# Altium PCB PCB1_1.pcbdoc
Units mil, origin at the board's own origin, x right, y up, seen from the top; angles counter-clockwise.
Board outline 3100 x 5680 mil, 2 copper layers (Top Layer, Bottom Layer); 60 components, 65 nets, 265 pads, 221 vias.
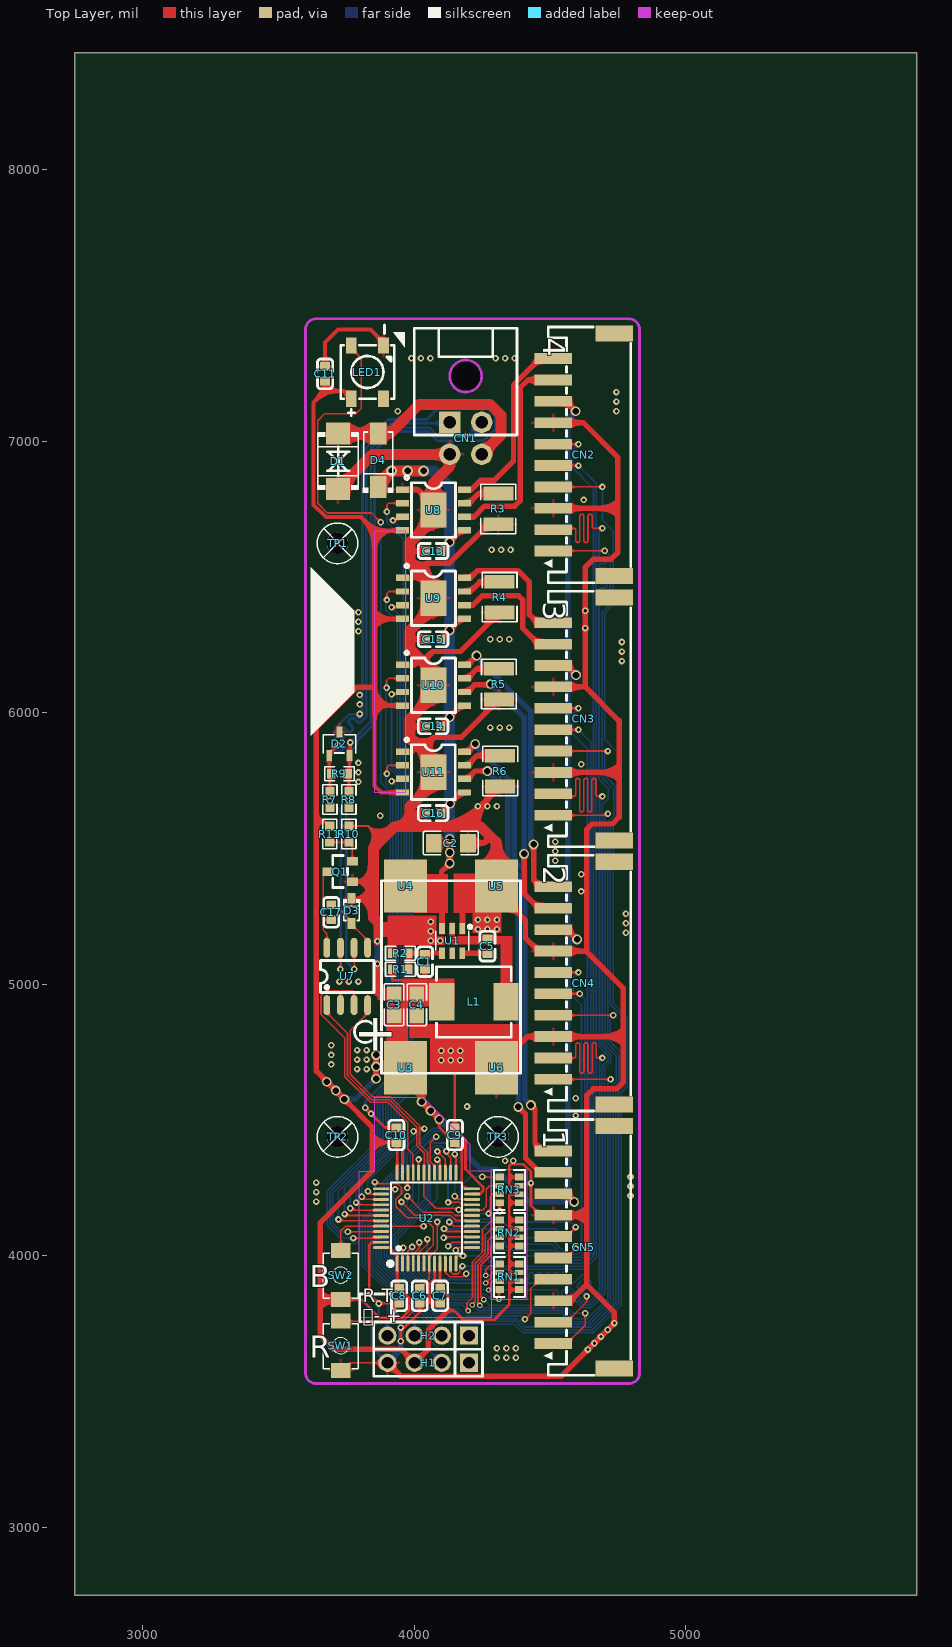
[diagram p0: Top Layer view]
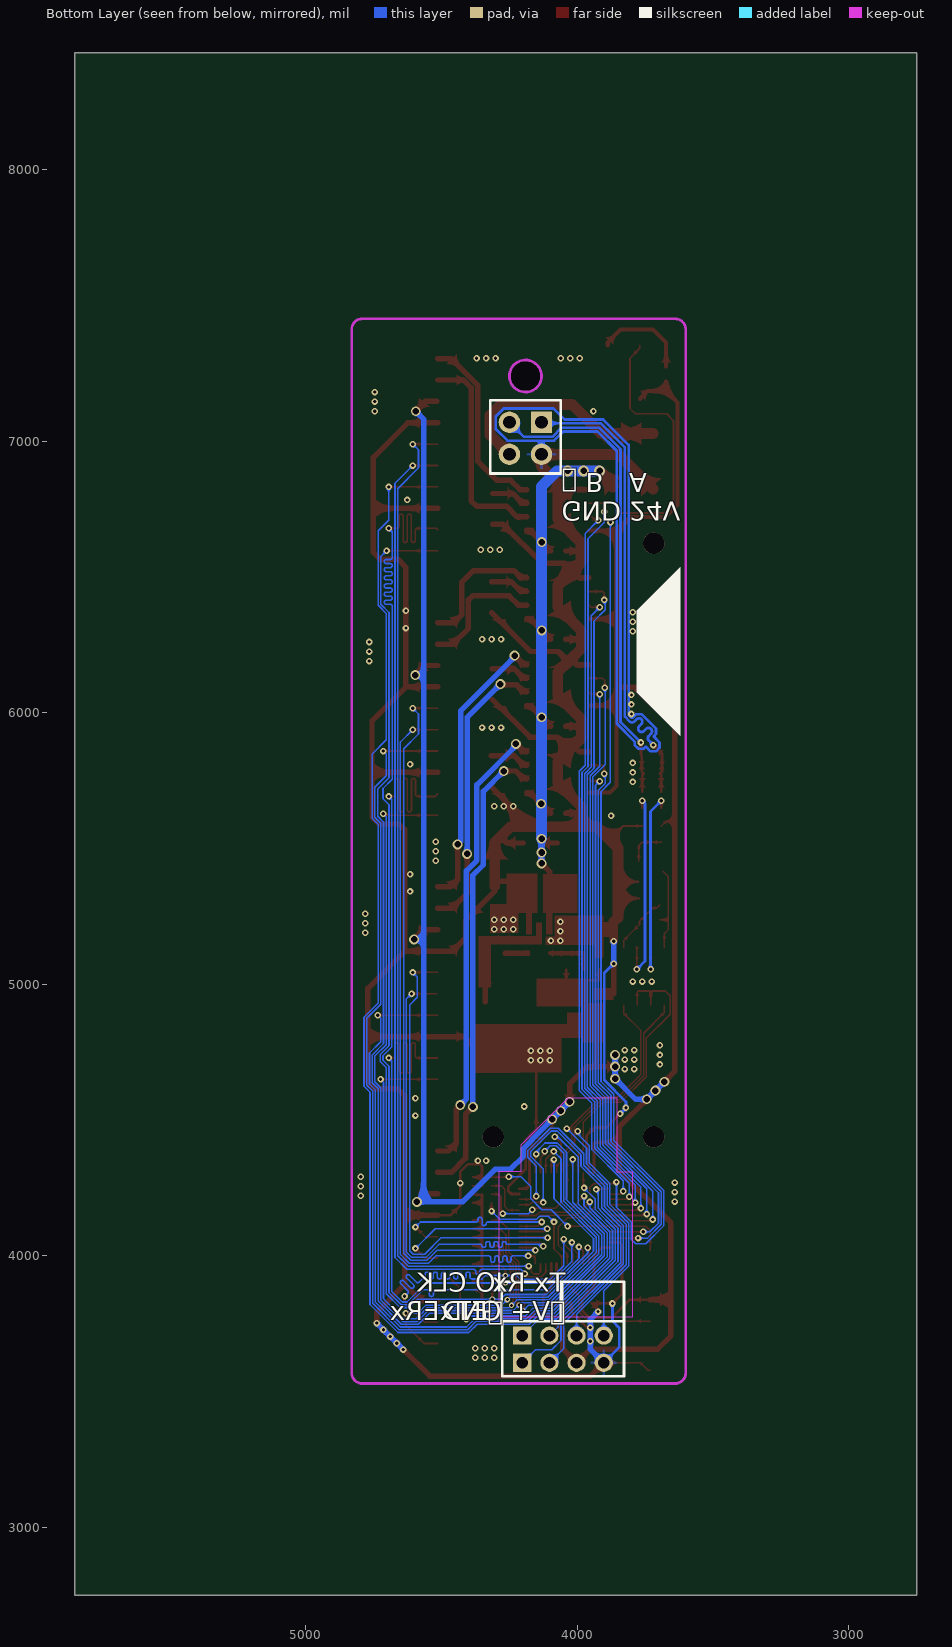
[diagram p1: Bottom Layer view, seen from below]

## Layer stack, top to bottom
Top Layer: signal copper (thickness not stored)
Dielectric: dielectric 12.6, FR-4, Dk 4.8
Bottom Layer: signal copper (thickness not stored)

## Board outline
5850,2750 2750,2750 2750,8430 5850,8430

## Design rules (kind name [scope] priority, off if disabled: settings)
BoardOutlineClearance copperThickness1oz [All] p0: genericclearance=10 ignorepadtopadclearanceinfootprint=FALSE except(0: Region-OutlineEdge Arc-SplitContinuation Track-SplitContinuation SMDPad-SplitContinuation THPad-SplitContinuation Via-SplitContinuation Fill-SplitContinuation Poly-SplitContinuation Region-SplitContinuation Text-SplitContinuation; 6: Track-OutlineEdge SMDPad-OutlineEdge THPad-OutlineEdge Via-OutlineEdge Fill-OutlineEdge Poly-OutlineEdge Text-OutlineEdge SMDPad-CutoutEdge THPad-CutoutEdge Via-CutoutEdge Fill-CutoutEdge Region-CutoutEdge; 11.8: Track-CutoutEdge)
BoardOutlineClearance copperThickness2oz [All] p0: genericclearance=10 ignorepadtopadclearanceinfootprint=FALSE except(0: Arc-SplitContinuation Track-SplitContinuation SMDPad-SplitContinuation THPad-SplitContinuation Via-SplitContinuation Fill-SplitContinuation Poly-SplitContinuation Region-SplitContinuation Text-SplitContinuation; 6: Track-OutlineEdge SMDPad-OutlineEdge THPad-OutlineEdge Via-OutlineEdge Fill-OutlineEdge Region-OutlineEdge Poly-OutlineEdge Text-OutlineEdge SMDPad-CutoutEdge THPad-CutoutEdge Via-CutoutEdge Fill-CutoutEdge Region-CutoutEdge; 11.8: Track-CutoutEdge)
Clearance copperThickness1oz [(InNet('$1N2752') OR InNet('$1N2756') OR InNet('$1N6554') OR InNet('24V') OR InNet('GND') OR InNet('3.3V') OR InNet('RS485_B') OR InNet('RS485_A') OR InNet('MCU_RX') OR InNet('MCU_TX') OR InNet('EXIT_TX') OR InNet('EXIT_RX') OR InNet('BOOT0') OR InNet('BOOT1') OR InNet('NRST') OR InNet('MCU_RTS') OR InNet('K_PULL1') OR InNet('K_ONLINE1') OR InNet('RGB_OUT1') OR InNet('MCU_SCL1') OR InNet('MCU_SDA1') OR InNet('MOTOR1_HOUT') OR InNet('MOTOR1_LOUT') OR InNet('K_PULL2') OR InNet('K_ONLINE2') OR InNet('RGB_OUT2') OR InNet('MCU_SCL2') OR InNet('MCU_SDA2') OR InNet('MOTOR2_HOUT') OR InNet('MOTOR2_LOUT') OR InNet('K_PULL3') OR InNet('K_ONLINE3') OR InNet('RGB_OUT3') OR InNet('MCU_SCL3') OR InNet('MCU_SDA3') OR InNet('MOTOR3_HOUT') OR InNet('MOTOR3_LOUT') OR InNet('K_PULL4') OR InNet('K_ONLINE4') OR InNet('RGB_OUT4') OR InNet('MCU_SCL4') OR InNet('MCU_SDA4') OR InNet('MOTOR4_HOUT') OR InNet('MOTOR4_LOUT') OR InNet('SWIO') OR InNet('SWCLK') OR InNet('SYS_RGB') OR InNet('$1N17664') OR InNet('$1N17864') OR InNet('$1N18070') OR InNet('$1N18276') OR InNet('MOTOR1_H') OR InNet('MOTOR1_L') OR InNet('MOTOR2_H') OR InNet('MOTOR2_L') OR InNet('MOTOR3_H') OR InNet('MOTOR3_L') OR InNet('MOTOR4_H') OR InNet('MOTOR4_L') OR InNet('$1N22936') OR InNet('$1N22933') OR InNet('$1N32717') OR InNet('$1N32182') OR InNet('$1N1340') OR InNet('$1N32139'))] p1: gap=7 ignorepadtopadclearanceinfootprint=FALSE except(0: Region-Sheet; 4: Track-Track; 6: Track-SMDPad SMDPad-SMDPad Track-THPad SMDPad-THPad THPad-THPad Track-Via SMDPad-Via THPad-Via Via-Via Track-Fill SMDPad-Fill THPad-Fill Via-Fill Fill-Fill SMDPad-Region THPad-Region Via-Region Fill-Region Region-Region Track-Poly SMDPad-Poly THPad-Poly Via-Poly Fill-Poly Poly-Poly Track-Text SMDPad-Text THPad-Text Via-Text Fill-Text Region-Text Poly-Text Text-Text Track-Sheet SMDPad-Sheet THPad-Sheet Via-Sheet Fill-Sheet Poly-Sheet Text-Sheet Track-Hole SMDPad-Hole THPad-Hole Via-Hole Fill-Hole Region-Hole Poly-Hole Text-Hole Sheet-Hole; 11.8: Track-Region Region-Poly)
Clearance copperThickness2oz [All] p1: gap=7 ignorepadtopadclearanceinfootprint=FALSE except(6: Track-SMDPad SMDPad-SMDPad Track-THPad SMDPad-THPad THPad-THPad Track-Via SMDPad-Via THPad-Via Via-Via Track-Fill SMDPad-Fill THPad-Fill Via-Fill Fill-Fill SMDPad-Region THPad-Region Via-Region Fill-Region Region-Region Track-Poly SMDPad-Poly THPad-Poly Via-Poly Fill-Poly Poly-Poly Track-Text SMDPad-Text THPad-Text Via-Text Fill-Text Region-Text Poly-Text Text-Text Track-Sheet SMDPad-Sheet THPad-Sheet Via-Sheet Fill-Sheet Region-Sheet Poly-Sheet Text-Sheet Track-Hole SMDPad-Hole THPad-Hole Via-Hole Fill-Hole Region-Hole Poly-Hole Text-Hole Sheet-Hole; 8: Track-Track; 11.8: Track-Region Region-Poly)
DiffPairsRouting differentialPair [All] p1: maxuncoupledlength=10 minlimit=5.9843 maxlimit=5.9843 mostfreqgap=5.9843 toplayer_minwidth=5 toplayer_prefwidth=10 toplayer_maxwidth=100 bottomlayer_minwidth=5 bottomlayer_prefwidth=10 bottomlayer_maxwidth=100
PasteMaskExpansion pasteMaskExpansion [All] p1: expansion=0
PlaneConnect innerPlane [All] p1: planeconnectstyle=Relief reliefexpansion=20 reliefentries=4 reliefconductorwidth=10 reliefairgap=10
PolygonConnect copperRegion [All] p1: connectstyle=Relief reliefentries=4 reliefconductorwidth=10 polygonreliefangle="90 Angle" airgapwidth=10
RoutingVias viaSize [All] p1: viastyle="Through Hole" holewidth=12.0078 minholewidth=11.811 maxholewidth=248.0314 width=24.0158 minwidth=19.685 maxwidth=393.7008
SolderMaskExpansion solderMaskExpansion [All] p1: useseparateexpansions=TRUE expansion=2.0079 expansionbottom=2.0079
Width copperThickness1oz [All] p1: maxlimit=100 minlimit=5 preferedwidth=10
Width copperThickness2oz [All] p1: maxlimit=100 minlimit=8 preferedwidth=10

## Components (designator, comment, footprint, x,y, rotation, side; value= is the part's Value field where it differs from the comment)
C1 "" C0603 4040,5083 r270 top
C2 "" C1206 4135,5520 r180 top
C3 "" C0805 3926.12,4925 r270 top
C4 "" C0805 4010,4925 r90 top
C5 "" C0603 4270,5140 r90 top
C6 "" C0603 4020.93,3853.15 r90 top
C7 "" C0603 4095.93,3853.15 r90 top
C8 "" C0603 3945.29,3853.15 r90 top
C9 "" C0603 4150,4445 r270 top
C10 "" C0603 3935,4445 r270 top
C11 "" C0603 3672.12,7247.03 r270 top
C13 "" C0603 4070,6595 r0 top
C14 "" C0603 4070.04,5950 r0 top
C15 "" C0603 4070.08,6270 r0 top
C16 "" C0603 4070.13,5630 r0 top
C17 "" C0603 3695,5265 r270 top
CN1 "" CONN-TH_4P-P3.00_HC-MX3.0-2X2AW_1 4190,7010 r180 top
CN2 "" CONN-SMD_10P-P2.00_2.0-10P-WT 4625.01,6949.09 r90 top
CN3 "" CONN-SMD_10P-P2.00_2.0-10P-WT 4625.01,5976.65 r90 top
CN4 "" CONN-SMD_10P-P2.00_2.0-10P-WT 4625.01,5004.21 r90 top
CN5 "" CONN-SMD_10P-P2.00_2.0-10P-WT 4625.01,4031.77 r90 top
D1 "" SMB_L4.6-W3.6-LS5.3-BI 3720,6925 r90 top
D2 "" SOT-23-3_L3.0-W1.7-P0.95-LS2.9-BR 3725,5885 r270 top
D3 "" SOD-323_L1.8-W1.3-LS2.5-RD 3770,5270 r270 top
D4 "" SMA_L4.4-W2.8-LS5.4-R-RD 3867.43,6929.08 r90 top
H1 "" HDR-TH_4P-P2.54-V-M 4051.82,3606.39 r180 top
H2 "" HDR-TH_4P-P2.54-V-M 4051.82,3706.39 r180 top
L1 "" IND-SMD_L7.3-W6.8 4220,4935 r180 top
LED1 "" LED-SMD_4P-L5.0-W5.0-BL_XL-5050RGBC 3828.08,7253.97 r0 top
Q1 "" SOT-23_L2.9-W1.3-P1.90-LS2.4-BR 3727.57,5415 r0 top
R1 "" R0603 3949,5055 r180 top
R2 "" R0603 3949,5114 r0 top
R3 "" R1210 4310,6750 r270 top
R4 "" R1210 4314.68,6425 r270 top
R5 "" R1210 4312.34,6105 r270 top
R6 "" R1210 4317.02,5785 r270 top
R7 "" R0603 3690,5680 r90 top
R8 "" R0603 3760,5680 r90 top
R9 "" R0603 3725,5775 r180 top
R10 "" R0603 3760,5552.8 r270 top
R11 "" R0603 3689.1,5552.8 r270 top
RN1 "" RES-ARRAY-SMD_0603-8P-L3.2-W1.6-BL 4350.93,3922.86 r270 top
RN2 "" RES-ARRAY-SMD_0603-8P-L3.2-W1.6-BL 4350.93,4084.3 r270 top
RN3 "" RES-ARRAY-SMD_0603-8P-L3.2-W1.6-BL 4350.93,4242.86 r270 top
SW1 "" KEY-SMD_B3U-1000PM 3730,3670 r270 top
SW2 "" KEY-SMD_B3U-1000PM 3730,3930 r270 top
TP1 "" M2螺丝 3718.11,6623.23 r0 top
TP2 "" M2螺丝 3718.11,4438.19 r0 top
TP3 "" M2螺丝 4308.66,4438.19 r0 top
U1 "={Manufacturer Part}" SOT-23-6_L2.9-W1.6-P0.95-LS2.8-BL 4140,5160 r180 top
U2 "" LQFP-48_L7.0-W7.0-P0.50-LS9.0-BL 4045.96,4138.97 r0 top
U3 "" "SMD 方焊盘 4*5" 3968.59,4692.41 r180 top
U4 "" "SMD 方焊盘 4*5" 3968.59,5361.7 r180 top
U5 "" "SMD 方焊盘 4*5" 4303.23,5361.7 r0 top
U6 "" "SMD 方焊盘 4*5" 4303.23,4692.41 r0 top
U7 "" SOP-8_L4.9-W3.9-P1.27-LS6.0-BL 3753.8,5028.77 r0 top
U8 "" ESOP-8_L4.9-W3.9-P1.27-LS6.0-BL-EP 4071.35,6745.92 r270 top
U9 "" ESOP-8_L4.9-W3.9-P1.27-LS6.0-BL-EP 4071.27,6420.92 r270 top
U10 "" ESOP-8_L4.9-W3.9-P1.27-LS6.0-BL-EP 4071.31,6100.92 r270 top
U11 "" ESOP-8_L4.9-W3.9-P1.27-LS6.0-BL-EP 4071.23,5780.92 r270 top

## Footprints (in the part's own frame and the unit in brackets; to place one, negate y for a bottom-side part, rotate by r counter-clockwise, add the part's x,y. Pads: shape width x height; smd on the part's side, far side on the other; paste and mask are expansions set on the pad)
C0603 [mm]
  rect 0.8x0.9 smd: 1(-0.7,0) 2(0.7,0)
  silkscreen extent -1.39,-0.71 1.39,0.71
C0805 [mm]
  rect 1.41x1.35 smd: 1(-1,0) 2(1,0)
  silkscreen extent -1.96,-0.9 1.96,0.9
C1206 [mm]
  rect 1.485x1.728 smd: 1(-1.593,0) 2(1.593,0)
  silkscreen extent -2.56,-1.09 2.56,1.09
CONN-SMD_10P-P2.00_2.0-10P-WT [mm]
  rect 1x3.5 smd: 1(-9,2.85) 2(-7,2.85) 3(-5,2.85) 4(-3,2.85) 5(-1,2.85) 6(1,2.85) 7(3,2.85) 8(5,2.85) 9(7,2.85) 10(9,2.85)
  rect 1.5x3.5 smd: 11(11.35,-2.85) 12(-11.35,-2.85)
  silkscreen extent -11.96,-4.37 11.95,3.74
CONN-TH_4P-P3.00_HC-MX3.0-2X2AW_1 [mm]
  rect 2x2 hole 1.2: 1(1.5,-1.5)
  round 2 hole 1.2: 2(1.5,1.5) 3(-1.5,-1.5) 4(-1.5,1.5)
  Board Outline Layer circle w0.005: c0,-5.82 r1.5
  Board Outline Layer circle w0.254: c0,-5.82 r1.5
  Multi-Layer board cut-out: -1.5,-5.82 -1.351,-6.471 -0.935,-6.993 -0.334,-7.282 0.334,-7.282 0.935,-6.993 1.352,-6.471 1.5,-5.82 1.5,-5.82 1.299,-5.07 0.75,-4.521 0,-4.32 -0.75,-4.521 -1.299,-5.07 -1.5,-5.82
  silkscreen extent -4.8,-10.3 4.8,-0.3
ESOP-8_L4.9-W3.9-P1.27-LS6.0-BL-EP [mm]
  rect 0.6x1.2 smd: 1(-1.905,-2.908) 2(-0.635,-2.908) 3(0.635,-2.908) 4(1.905,-2.908) 5(1.905,2.908) 6(0.635,2.908) 7(-0.635,2.908) 8(-1.905,2.908)
  rect 3.3x2.4 smd: 9(0,0)
  silkscreen extent -3.2,-2.67 2.55,2.05
HDR-TH_4P-P2.54-V-M [mm]
  rect 1.7x1.7 hole 1.1: 1(-3.81,0)
  round 1.7 hole 1.1: 2(-1.27,0) 3(1.27,0) 4(3.81,0)
  silkscreen extent -5.08,-1.27 5.08,1.27
IND-SMD_L7.3-W6.8 [mm]
  rect 2.35x3.5 smd: 1(-3,0) 2(3,0)
  silkscreen extent -3.5,-3.3 3.5,3.3
KEY-SMD_B3U-1000PM [mm]
  rect 1.4x1.8 smd: 1(-2.286,0) 2(2.314,0)
  silkscreen extent -2.04,-1.65 2.16,1.65
LED-SMD_4P-L5.0-W5.0-BL_XL-5050RGBC [mm]
  rect 1x1.5 smd: 1(-1.5,-2.5) 2(1.5,-2.5) 3(1.5,2.5) 4(-1.5,2.5)
  silkscreen extent -2.5,-4.1 2.5,4.4
LQFP-48_L7.0-W7.0-P0.50-LS9.0-BL [mm]
  oval 0.27x1.5 smd: 1(-2.75,-4.25) 2(-2.25,-4.25) 3(-1.75,-4.25) 4(-1.25,-4.25) 5(-0.75,-4.25) 6(-0.25,-4.25) 7(0.25,-4.25) 8(0.75,-4.25) 9(1.25,-4.25) 10(1.75,-4.25) 11(2.25,-4.25) 12(2.75,-4.25) 25(2.75,4.25) 26(2.25,4.25) 27(1.75,4.25) 28(1.25,4.25) 29(0.75,4.25) 30(0.25,4.25) 31(-0.25,4.25) 32(-0.75,4.25) 33(-1.25,4.25) 34(-1.75,4.25) 35(-2.25,4.25) 36(-2.75,4.25)
  oval 1.5x0.27 smd: 13(4.25,-2.75) 14(4.25,-2.25) 15(4.25,-1.75) 16(4.25,-1.25) 17(4.25,-0.75) 18(4.25,-0.25) 19(4.25,0.25) 20(4.25,0.75) 21(4.25,1.25) 22(4.25,1.75) 23(4.25,2.25) 24(4.25,2.75) 37(-4.25,2.75) 38(-4.25,2.25) 39(-4.25,1.75) 40(-4.25,1.25) 41(-4.25,0.75) 42(-4.25,0.25) 43(-4.25,-0.25) 44(-4.25,-0.75) 45(-4.25,-1.25) 46(-4.25,-1.75) 47(-4.25,-2.25) 48(-4.25,-2.75)
  silkscreen extent -3.59,-4.46 3.3,3.34
M2螺丝 [mm]
  round 2 hole 2: 1(0,0)
  silkscreen extent -1.9,-1.9 1.9,1.9
R0603 [mil]
  rect 31.75x34.02 smd: 1(-29.66,0) 2(29.66,0)
  silkscreen extent -55,-26 55,26
R1210 [mil]
  rect 50.49x110.55 smd: 1(-56.74,0) 2(56.74,0)
  silkscreen extent -91,-64 91,64
RES-ARRAY-SMD_0603-8P-L3.2-W1.6-BL [mm]
  rect 0.65x0.8 smd: 1(-1.2,-0.9) 4(1.2,-0.9) 5(1.2,0.9) 8(-1.2,0.9)
  rect 0.5x0.8 smd: 2(-0.4,-0.9) 3(0.4,-0.9) 6(0.4,0.9) 7(-0.4,0.9)
  silkscreen extent -1.87,-1.45 1.87,1.47
SMA_L4.4-W2.8-LS5.4-R-RD [mil]
  rect 81.2x60.59 smd: 1(98.57,0) 2(-98.57,0)
  silkscreen extent -119,-56 104,56
SMB_L4.6-W3.6-LS5.3-BI [mil]
  rect 80.61x88.23 smd: 1(-102.02,0) 2(102.02,0)
  silkscreen extent -105,-75 108,75
"SMD 方焊盘 4*5" [mm]
  rect 4x5 smd: 1(0,0)
SOD-323_L1.8-W1.3-LS2.5-RD [mm]
  rect 1x0.75 smd: 1(-1.173,0) 2(1.173,0)
  silkscreen extent -1.08,-0.8 0.9,0.8
SOP-8_L4.9-W3.9-P1.27-LS6.0-BL [mm]
  oval 0.63x1.865 smd: 1(-1.905,-2.682) 2(-0.635,-2.682) 3(0.635,-2.682) 4(1.905,-2.682) 5(1.905,2.682) 6(0.635,2.682) 7(-0.635,2.682) 8(-1.905,2.682)
  silkscreen extent -2.5,-1.5 2.5,1.48
SOT-23-3_L3.0-W1.7-P0.95-LS2.9-BR [mil]
  rect 40.85x20.95 smd: 1(43.36,-37.4) 2(43.36,37.4) 3(-43.36,0)
  silkscreen extent -34,-60 34,60
SOT-23-6_L2.9-W1.6-P0.95-LS2.8-BL [mil]
  rect 20.95x42.2 smd: 1(-37.4,-45.24) 2(0,-45.24) 3(37.4,-45.24) 4(37.4,45.24) 5(0,45.24) 6(-37.4,45.24)
  silkscreen extent -72,-57 61,35
SOT-23_L2.9-W1.3-P1.90-LS2.4-BR [mm]
  rect 1x0.8 smd: 1(1.15,-0.95) 2(1.15,0.95) 3(-1.15,0)
  silkscreen extent -0.7,-1.5 0.7,1.5

## Via types
v1: diameter 24.02, hole 12.01, Top Layer to Bottom Layer, 182 vias
v2: diameter 36, hole 24, Top Layer to Bottom Layer, 28 vias
v3: diameter 19.68, hole 11.81, Top Layer to Bottom Layer, 8 vias
v4: diameter 40, hole 24, Top Layer to Bottom Layer, 3 vias

## Nets (pads, with @x,y where several pads share a name; then routed paths per layer and width w, separated by ;. In a path a pad name is that pad's centre, name@x,y a point inside that pad or via, vN(x,y) a via of type N, cw(c..) or ccw(c..) an arc to the next point about the centre after c; other vN are vias at no path point)
3.3V: C1.2 C3.2 C4.2 C7.2 C8.2 C9.2 C10.2 C11.2 CN2.8 CN3.8 CN4.8 CN5.8 H1.3 L1.2 LED1.1 R1.2 R11.1 RN1.5 RN1.6 RN1.7 RN1.8 RN2.5 RN2.6 RN2.7 RN2.8 RN3.5 RN3.6 SW2.2 U2.1 U2.9 U2.24 U2.36 U2.48 U3.1 U8.4 U9.4 U10.4 U11.4 | length 13554.9
  Top Layer w6: 3640,5600 3671.57,5600 R11.1 ; 3655,3838.72 3655.18,3838.9 ; 4350,3875 4385.74,3875 RN1.5 ; 4350,3907.21 4350.09,3907.11 RN1.6 ; 4350,3935.99 4383.74,3935.99 RN1.7 ; 4350,3970.23 4350.13,3970.1 RN1.8 ; 4350,4037.89 4350.83,4037.06 RN2.5 ; 4350,4067.79 4350.76,4068.55 RN2.6 ; 4350,4098.68 4351.38,4100.05 RN2.7 ; 4350,4131.01 4385.84,4131.01 RN2.8 ; 4350,4195.45 4350.18,4195.62 RN3.5 ; 4350,4225 4384.25,4225 RN3.6
  Top Layer w10: SW2.2 3806.1,3838.9 3872.98,3772.02 3955.02,3772.02 3982.21,3799.21 3982.21,3843.78 C8.2 3937.69,3888.31 U2.1 3937.69,4002.31 3909.3,4030.7 U2.48 ; 3845,4417.01 3845.43,4417.44 C10.2 3937.69,4414.75 U2.36 ; R1.2@3920.34,5055 3920.34,5015 4009.93,5015 4040,5015 C1.2@4040,5052.44 ; C4.2 4010,5014.93 ; v2(4092.3,4502.7) 4092.3,4475.14 C9.2 4175,4392.44 4175,4260 4187.76,4247.24 U2.24 ; U2.9 4095.17,3881.47 C7.2 4124.63,3852.01 4124.63,3798.22 4146.78,3798.22 4180,3765 4295,3765 4350,3820 4350,3875 4350,3907.21 4350,3935.99 4350,3970.23 4350,4037.89 4350,4067.79 4350,4098.68 4350,4131.01 4350,4195.45 4350,4225
  Top Layer w15: C11.2 3672.12,7184.47 3671.52,7183.86 ; LED1.1 3740.71,7183.86 3671.52,7183.86 ; 3854.39,6344.78 3955.63,6344.78 U9.4 ; U11.4 3879.08,5705.92 3854.39,5730.61 3854.39,6025.84 3854.47,6025.92 U10.4 ; U8.4 3955.93,6670 3854.39,6670 3804.39,6720 3675,6720 3630,6765 3630,7142.35 3671.52,7183.86
  Top Layer w20: 3655.18,3838.9 SW2.2 ; 3854.39,6025.84 3854.39,6092.99 ; 3854.39,6670 3854.39,6344.78 3854.39,6092.99 ; v2(3860,4652.31) v2(3860,4696.9) ; v2(3860,4740) v2(3860,4696.9) ; v2(4092.3,4502.7) v2(4060.52,4534.48) v2(4027.5,4567.5) 4027.5,4633.5 U3.1 ; L1.2 4101.89,4964.37 C4.2 4006.62,4964.37 3927.88,4885.63 3927.88,4712.12 U3.1@3943.1,4696.9 ; 4128.17,3801.75 4124.63,3798.22 4082.25,3755.84 4081.33,3755.84 4052.37,3726.87 4052.37,3656.94 H1.3 3951.27,3656.94 3703.06,3656.94 3655,3705 3655,3838.72 3655,4122.16 3845,4312.16 3845,4417.01 3845,4475 v2(3743.35,4576.65) v2(3711.57,4608.43) v2(3678.54,4641.46) 3640,4680 3640,5600 3640,5944.59 3788.41,6092.99 3854.39,6092.99 ; CN5.8 4559.35,4228.62 v2(4589.42,4198.55) ; CN4.8 4563.94,5201.06 v2(4600,5165) ; CN3.8 4560.94,6173.5 v2(4596.02,6138.43) ; CN2.8@4517.13,7145.94 4558.27,7145.94 v2(4594.34,7109.88) ; v2(3860,4696.9) U3.1@3943.1,4696.9 ; U3.1@3943.1,4696.9 3947.59,4692.41 U3.1 ; U3.1@3943.1,4696.9 3964.1,4696.9 U3.1
  Bottom Layer w20: v2(3678.54,4641.46) v2(3711.57,4608.43) v2(3743.35,4576.65) 3784.35,4576.65 v2(3860,4652.31) v2(3860,4696.9) v2(3860,4740) ; v2(4027.5,4567.5) v2(4060.52,4534.48) v2(4092.3,4502.7) 4165,4430 4165,4428.23 4198.02,4395.2 4198.02,4366.23 4245,4319.25 4300.75,4319.25 4421.45,4198.55 4565,4198.55 ; v2(4589.42,4198.55) 4565,4198.55 ; v2(4594.34,7109.88) 4565,7080.54 4565,6137.97 ; v2(4596.02,6138.43) 4595.55,6137.97 4565,6137.97 ; v2(4600,5165) 4567.33,5165 4565,5167.33 ; 4565,4198.55 4565,5167.33 ; 4565,5167.33 4565,6137.97
24V: C2.2 C13.2 C14.2 C15.2 C16.2 D4.2 U1.3 U4.1 U8.5 U9.5 U10.5 U11.5 | length 2534.4
  Top Layer w20: C2.2 v2@4130.94,5520 ; 4095.63,5380 4100.82,5380 4100.82,5414.88 v2(4130.94,5445) v2(4130.94,5485.07) v2@4130.94,5520 ; C13.2 v2(4130.5,6627.94) 4173.48,6670.92 U8.5 ; C14.2 4173.52,6025.92 U10.5 ; C15.2 v2(4130.29,6302.64) 4173.56,6345.92 U9.5 ; C16.2 v2(4132.64,5664.96) 4173.6,5705.92 U11.5 ; v2(4130.94,5536.02) v2@4130.94,5520
  Top Layer w40: D4.2 3867.43,6840.51 v4(3916.92,6890) v4(3976.2,6890) v4(4035,6890)
  Bottom Layer w20: v2(4130.94,5445) v2(4130.94,5485.07) v2(4130.94,5536.02)
  Bottom Layer w40: v4(3916.92,6890) v4(3976.2,6890) v4(4035,6890) 4073.78,6890 4130.94,6832.84 v2(4130.94,5982.72) v2(4130.94,5536.02)
$1N1340: C17.1 D3.2 U7.5 | length 222.2
  Top Layer w6: C17.1 3707.56,5280 3722.32,5280 3770,5232.32 D3.2 3770,5220.22 3828.8,5161.42 U7.5
$1N2752: C5.2 L1.1 U1.2 | length 448.7
  Top Layer w20: U1.2@4140,5200.24 4140,5171.96 4154.14,5157.81 4327.19,5157.81 4338.11,5146.89 L1.1
$1N2756: C5.1 U1.6 | length 93.6
  Top Layer w10: U1.6 4267.68,5114.76 C5.1
$1N6554: C1.1 R1.1 R2.2 U1.4 | length 183.3
  Top Layer w10: R1.1 R2.2 4101.84,5114 U1.4
$1N17664: R3.1 U8.7 | length 139
  Top Layer w20: U8.7 4200.92,6770.92 4236.74,6806.74 R3.1
$1N17864: R4.1 U9.7 | length 143.7
  Top Layer w20: U9.7 4205.92,6445.92 4241.74,6481.74 R4.1
$1N18070: R5.1 U10.7 | length 141.4
  Top Layer w20: U10.7 4195.92,6125.92 4231.74,6161.74 R5.1
$1N18276: R6.1 U11.7 | length 146.1
  Top Layer w20: U11.7 4195.92,5805.92 4231.74,5841.74 R6.1
$1N22933: CN1.1 D2.1 R7.2 R9.2 | length 1775.8
  Top Layer w10: R7.2 3690,5769.66 R9.2 3687.6,5782.74 D2.1 3687.6,5848.58 v1(3719.51,5880.49)
  Bottom Layer w10: v1(3719.51,5880.49) 3735.94,5896.93 ccw(c3727.1,5905.77) 3735.94,5914.6 3728.04,5922.51 cw(c3736.88,5931.35) 3745.72,5940.18 3753.62,5932.28 ccw(c3762.46,5941.12) 3771.3,5949.96 3763.4,5957.86 cw(c3772.24,5966.7) 3781.07,5975.54 3788.98,5967.64 ccw(c3797.81,5976.48) 3806.65,5967.64 3824.02,5985 3824.02,6976.44 3912.57,7065 4126.89,7065 CN1.1
$1N22936: CN1.3 D2.2 R8.2 R9.1 | length 1775.8
  Top Layer w10: R8.2 3760,5769.66 R9.1 3762.4,5782.74 D2.2 3765,5844.24 v1(3765,5890)
  Bottom Layer w10: v1(3765,5890) 3840,5965 3840,6969.82 3919.19,7049.02 4056.71,7049.02 4090.41,7015.31 4195.31,7015.31 CN1.3
$1N32139: Q1.2 R10.2 R11.2 | length 147
  Top Layer w6: R11.2 R10.2 3772.85,5510.3 Q1.2
$1N32182: C17.2 Q1.3 U7.8 | length 323.8
  Top Layer w6: U7.8 3678.8,5186.2 3665,5200 3665,5236.71 3665.73,5237.44 ; Q1.3 3665,5397.71 3665,5237.44 3665.73,5237.44 ; C17.2 3665.73,5237.44
$1N32717: CN1.4 D1.2 D4.1 | length 834.7
  Top Layer w40: D1.2 3866.8,7027.02 D4.1 3911.38,7027.65 4018.73,7135 4280,7135 4320,7095 4320,7021.89 CN1.4
BOOT0: RN3.1 SW2.1 U2.44 | length 766.4
  Top Layer w6: SW2.1 3730,4092.14 3747.3,4109.44 U2.44 v1(4035,4109.44) ; v1(4251.26,4291.26) 4252.41,4290.1 RN3.1
  Bottom Layer w6: v1(4035,4109.44) 4095.56,4170 4129.69,4170 4170.99,4211.3 4170.99,4255.43 4206.82,4291.26 v1(4251.26,4291.26)
BOOT1: RN3.2 U2.20 | length 177
  Top Layer w6: U2.20 4252.5,4168.5 4265.81,4181.81 4265.81,4245.81 4278.61,4258.61 RN3.2
EXIT_RX: H1.2 U2.22 | length 1470.9
  Top Layer w6: v1(4150,4220) 4162.13,4207.87 U2.22
  Bottom Layer w6: H1.2 4049.35,3658.85 4049.35,3751.24 3829.53,3971.06 3829.53,4111.57 3899.15,4181.19 3899.15,4257.69 3975.41,4333.95 3975.41,4376.49 4068.92,4470 4099.16,4470 4181.01,4388.16 4181.01,4362.16 4180.02,4361.16 4180.02,4360.85 4150,4330.84 v1(4150,4220)
EXIT_TX: H1.1 U2.21 | length 1563.1
  Top Layer w6: v1(4125,4196.8) 4167.29,4196.8 4175.9,4188.18 U2.21
  Bottom Layer w6: v1(4125,4196.8) 4125,4320 4170,4365 4170,4365.31 4170.99,4366.3 4170.99,4383.7 4170,4384.69 4170,4385 4095.02,4459.98 4073.07,4459.98 3985.42,4372.34 3985.42,4329.8 3909.16,4253.54 3909.16,4177.04 3839.54,4107.42 3839.54,3975.21 4059.37,3755.39 4059.37,3688.8 4093.17,3655 4153.2,3655 H1.1
GND: C2.1 C3.1 C4.1 C6.1 C7.1 C8.1 C9.1 C10.1 C11.1 C13.1 C14.1 C15.1 C16.1 CN1.2 CN2.3 CN2.7 CN3.3 CN3.7 CN4.3 CN4.7 CN5.3 CN5.7 D1.1 D2.3 D3.1 H1.4 LED1.3 Q1.1 R2.1 R3.2 R4.2 R5.2 R6.2 R10.1 RN3.7 RN3.8 SW1.2 U1.1 U2.8 U2.23 U2.35 U2.47 U5.1 U6.1 U8.1 U8.9 U9.1 U9.9 U10.1 U10.9 U11.1 U11.9 | length 20382.8
  Top Layer w6: SW1.2 3738.9,3578.9 3766.39,3606.39 H1.4 ; R10.1 3830.03,5582.46 3880.35,5532.15 ; D3.1 3849.04,5316.16 3850,5317.13 ; Q1.1 3849.35,5377.6 3850,5376.95 ; 4350,4258.61 RN3.7 ; 4350,4290.1 RN3.8
  Top Layer w10: v1(3820,4545) v1(3841.69,4523.31) 3892.44,4472.56 C10.1 3965,4442.56 3965,4395 3957.38,4387.38 U2.35 ; U2.47 3845.39,4050.39 3835,4040 3835,3860 3869.41,3825.59 C8.1 3922.81,3803.11 v1(3922.81,3795.01) ; v1(3951.27,3685.53) v1(3951.27,3736.28) 3963.8,3736.28 4020.93,3793.41 C6.1 4055,3825.59 ; U2.8 4075.49,3915.49 4055,3895 4055,3825.59 ; C7.1 4055,3825.59 ; 4190.84,4330 4189.02,4328.17 ; U2.23 4242.55,4227.55 4253.79,4238.79 4253.79,4254.31 4189.02,4319.09 4189.02,4328.17 ; U6.1 4150,4692.41 C9.1 4150,4466.44 4189.02,4427.42 4189.02,4328.17 ; 4350,4258.61 4350,4290.1 4350,4330 4357.07,4337.07 4402.93,4337.07 4430,4310 v1(4430,4268.18) 4430,4185 4465.12,4149.88 CN5.7
  Top Layer w15: C11.1 3672.12,7362.12 3720,7410 3840,7410 3887.13,7362.87 LED1.3
  Top Layer w20: v1(3865,5075.76) 3865,4964.37 C3.1@3927.88,4964.37 ; H1.4 3951.27,3556.94 4541.94,3556.94 v1(4640,3655) v1(4663.72,3678.72) v1(4687.94,3702.94) v1(4712.74,3727.74) v1(4737.54,3752.54) 4737.54,3792.46 4635,3895 ; U11.1 3990.92,5855.92 4005,5870 ; U9.1 3992.93,6495.92 4018.5,6521.5 4047.01,6550 4130,6550 4273.26,6693.26 R3.2 ; U10.1 4000.71,6175.92 4022.39,6197.61 ; U8.1 4014.08,6820.92 U8.9@4071.35,6763.65 ; 3984.76,5628.44 3986.32,5630 C16.1 ; 3984.84,5949.32 3985.52,5950 C14.1 ; 3984.97,6270 C15.1 ; 3985,6591.6 3988.4,6595 C13.1 ; C4.1 4010,4820 4135,4820 v1(4135,4755) ; 4026.88,5863.12 4073.76,5910 4174.08,5910 R5.2 ; 4031.93,6188.07 4068.85,6225 4171.42,6225 R4.2 ; 4168.76,5580 R6.2 ; 4174.37,5380 4284.94,5380 U5.1 4303.23,5341.77 4410,5235 4410,5170 4457.68,5122.32 CN4.7 4632.68,5122.32 4635,5120 ; C2.1 4259.08,5520 4282.04,5542.96 ; U6.1 4418.18,4807.36 CN4.3 4769.19,4807.36 4770,4808.17 ; CN5.3 4574.92,3834.92 4635,3895 ; CN5.7 4633.66,4149.88 4635,4151.23 ; CN3.3 4752.07,5779.8 4755,5776.87 ; CN3.7 4630,6094.76 ; CN2.3 4748.34,6752.24 4750,6750.59 ; CN2.7 4622.8,7067.2 4750,6940 4750,6750.59 ; 4630,6094.76 4630.24,6094.76 4755,5970 4755,5776.87 ; 4630,6094.76 v1(4630,6311.26) v1(4630,6374.69) 4630,6535 4660,6565 4725,6565 4750,6590 4750,6750.59 ; 4635,3895 4635,4151.23 ; 4635,4151.23 4635,4590 4660,4615 4745,4615 4770,4640 4770,4808.17 ; 4635,5120 4770,4985 4770,4808.17 ; 4635,5120 4635,5570 4655,5590 4730,5590 4755,5615 4755,5776.87
  Top Layer w30: v1(3865,5157.93) 3865,5230
  Top Layer w40: D1.1 3847.02,6950 4130,6950 CN1.2 4130.94,6905.94 4071.35,6846.35 4071.35,6763.65 U8.9 4071.35,6713.24 3985,6626.89 3985,6591.6 3985,6555 4018.5,6521.5 4071.27,6468.73 U9.9 4071.27,6388.24 3984.92,6301.89 3984.92,6269.95 3984.92,6235.08 4022.39,6197.61 4031.93,6188.07 4071.19,6148.81 4071.19,6063.24 3984.84,5976.89 3984.84,5949.32 3984.84,5905.16 4026.88,5863.12 4071.11,5818.89 4071.11,5741.11 3984.76,5654.76 3984.76,5628.44 3984.76,5580 ; 3865,5230 3850,5245 3850,5317.13 3850,5376.95 3850,5501.81 3880.35,5532.15 3928.19,5580 3984.76,5580 ; U5.1 4303.23,5521.77 4282.04,5542.96 4245,5580 4168.76,5580 3984.76,5580
  Bottom Layer w10: 3790.98,5985.45 3795.41,5981.03 3800.22,5981.03 3810,5990.81 3810,6985 3904.02,7079.02 4046.63,7079.02 4087.03,7119.41 4269.91,7119.41 4299.41,7089.91 4299.41,7044.41 4256.3,7001.3 4131.29,7001.3 ; 3790.98,5985.54 3782.31,5994.22 3762.16,5994.22 3709.36,5941.42 3709.36,5921.36 3717.86,5912.86 3717.86,5911.36 3696.52,5890.02 3696.52,5870.97 3709.98,5857.5 3729.03,5857.5 3745.27,5873.74 3748.74,5873.74 3755.48,5867.01 3774.52,5867.01 3787.99,5880.48 3787.99,5893.17 3854.02,5959.19 3854.02,6964.02 3925,7035 4050.9,7035 4084.61,7001.3 4131.29,7001.3 ; v1(3841.69,4523.31) v1(3820,4545) 3820,4566.99 3900,4646.99 3900,5040.76 v1(3865,5075.76) ; v1(3869.75,3824.75) 3869.75,3760.25 ; 3870,3760 3869.75,3760.25 ; H1.4 3845,3663.2 3845,3735.5 3869.75,3760.25 ; CN1.2 4131.29,6951.29 4131.29,7001.3
  Bottom Layer w20: v1(3865,5075.76) v1(3865,5157.93) ; H1.4 3951.27,3655.84 v1(3951.27,3685.53) v1(3951.27,3736.28) 3951.27,3766.55 v1(3922.81,3795.01) ; v1(4640,3655) v1(4663.72,3678.72) v1(4687.94,3702.94) v1(4712.74,3727.74) v1(4737.54,3752.54)
  other v1: 4305,3625 4340,3625 4375,3625 4305,3660 4340,3660 4375,3660 3640,4200 4796.66,4221.55 3640,4235 4796.66,4256.55 3640,4270 4796.66,4291.55 4335,4350 4365,4350 4595,4516.57 4195,4550 4595,4580 3789.87,4687.63 3824.87,4687.63 3695,4705 4100,4720 4135,4720 4170,4720 3789.87,4722.63 3824.87,4722.63 3695,4740 4100,4755 4170,4755 3789.87,4757.63 3824.87,4757.63 3695,4775 3725,5010 3760,5010 3795,5010 4061.35,5160 4096.35,5160 4780,5190 4061.35,5195 4234.89,5202.09 4269.89,5202.09 4304.89,5202.09 4780,5225 4061.35,5230 4234.89,5237.09 4269.89,5237.09 4304.89,5237.09 4780,5260 4615,5341.57 4615,5405 4520,5455 4520,5490 4520,5525 3875,5620 4235,5655 4270,5655 4305,5655 3795,5745 3795,5780 4615,5810 3795,5815 4280,5945 4315,5945 4350,5945 3800,5995 3800,6030 3800,6065 4765,6190 4765,6225 4765,6260 4280,6270 4315,6270 4350,6270 3795,6300 3795,6335 3795,6370 4285,6600 4320,6600 4355,6600 4625,6783.03 3940,7110 4745,7110 4745,7145 4745,7180 3990,7305 4025,7305 4060,7305 4300,7305 4335,7305 4370,7305
K_ONLINE1: CN2.6 U2.11 | length 3715
  Top Layer w6: U2.11 4134.54,3940.46 4141.86,3933.14 4160.15,3933.14 4168.53,3941.52 4168.53,3953.08 v1(4177.81,3962.36) ; CN2.6 v1(4605,6988.46)
  Bottom Layer w6: v1@4177.85,3962.41 4621.92,3962.41 4660.41,4000.9 4660.41,6824.62 4584.01,6901.03 4584.01,6967.47 v1(4605,6988.46)
K_ONLINE2: CN3.6 U2.13 | length 2704.5
  Top Layer w6: v1(4153.22,4021.18) 4162.74,4030.7 U2.13 ; CN3.6 v1(4605,6016.02)
  Bottom Layer w6: v1(4153.22,4021.18) 4515.42,4021.18 4552.19,3984.41 4612.81,3984.41 4638.41,4010.01 4638.41,5866.59 4584.01,5920.99 4584.01,5995.03 v1(4605,6016.02)
K_ONLINE3: CN4.6 U2.15 | length 1779.3
  Top Layer w6: v1(4108.59,4066.41) 4112.25,4070.07 U2.15 ; CN4.6 v1(4605,5043.58)
  Bottom Layer w6: v1(4108.59,4066.41) 4501.3,4066.41 4561.3,4006.41 4603.7,4006.41 4616.41,4019.12 4616.41,4923.59 4588.34,4951.66 4588.34,5026.92 v1(4605,5043.58)
K_ONLINE4: CN5.6 U2.17 | length 701.7
  Top Layer w6: v1(4129.72,4124.72) 4145,4109.44 U2.17 ; CN5.6 4560,4071.14 v1(4595,4106.14)
  Bottom Layer w6: v1(4129.72,4124.72) 4328.36,4124.72 cw(c4328.36,4118.35) 4334.73,4118.35 ccw(c4341.1,4118.35) 4341.1,4111.98 4343.36,4111.98 ccw(c4343.36,4118.35) 4349.73,4118.35 4349.73,4134.48 cw(c4357.23,4134.48) 4364.73,4134.48 4364.73,4132.22 ccw(c4372.23,4132.22) 4372.23,4124.72 4576.42,4124.72 v1(4595,4106.14)
K_PULL1: CN2.5 U2.10 | length 3683.6
  Top Layer w6: U2.10 4114.86,3940.14 4131.88,3923.12 4181,3923.12 v1(4191.88,3934.01) ; CN2.5 v1(4605,6909.72)
  Bottom Layer w6: v1(4191.88,3934.01) 4191.88,3935.04 4207.27,3950.42 4350.35,3950.42 cw(c4350.35,3942.92) 4357.85,3942.92 4357.85,3939.26 ccw(c4365.35,3939.26) 4372.85,3939.26 4372.85,3942.92 cw(c4380.35,3942.92) 4380.35,3950.42 4626.88,3950.42 4670.42,3993.96 4670.42,6844.3 v1(4605,6909.72)
K_PULL2: CN3.5 U2.12 | length 2691
  Top Layer w6: U2.12 4154.23,3994.23 4160,4000 v1(4180,4000) ; CN3.5 v1(4605,5937.28)
  Bottom Layer w6: v1(4180,4000) 4235.65,4000 cw(c4235.65,3992.5) 4243.15,3992.5 4243.15,3984.1 ccw(c4250.65,3984.1) 4258.15,3984.1 4258.15,3992.5 cw(c4265.65,3992.5) 4273.15,3992.5 4273.15,3984.1 ccw(c4280.65,3984.1) 4288.15,3984.1 4288.15,3992.5 cw(c4295.65,3992.5) 4303.15,3992.5 4303.15,3984.1 ccw(c4310.65,3984.1) 4318.15,3984.1 4318.15,3992.5 cw(c4325.65,3992.5) 4325.65,4000 4519.65,4000 4547.23,3972.42 4617.77,3972.42 4650.39,4005.05 4650.39,5891.89 v1(4605,5937.28)
K_PULL3: CN4.5 U2.14 | length 1767.6
  Top Layer w6: v1(4125,4035.39) 4140,4050.39 U2.14 ; CN4.5@4517.13,4964.84 v1(4609.34,4964.84)
  Bottom Layer w6: v1(4125,4035.39) 4131.78,4042.17 4255.92,4042.17 ccw(c4255.92,4047.07) 4260.81,4047.07 cw(c4265.71,4047.07) 4265.71,4051.97 4270.92,4051.97 cw(c4270.92,4047.07) 4275.81,4047.07 4275.81,4037.28 ccw(c4280.71,4037.28) 4280.71,4032.38 4285.92,4032.38 ccw(c4285.92,4037.28) 4290.81,4037.28 4290.81,4047.07 cw(c4295.71,4047.07) 4295.71,4051.97 4300.92,4051.97 cw(c4300.92,4047.07) 4305.81,4047.07 4305.81,4037.28 ccw(c4310.71,4037.28) 4310.71,4032.38 4315.92,4032.38 ccw(c4315.92,4037.28) 4320.81,4037.28 4320.81,4047.07 cw(c4325.71,4047.07) 4325.71,4051.97 4330.92,4051.97 cw(c4330.92,4047.07) 4335.81,4047.07 4335.81,4037.28 ccw(c4340.71,4037.28) 4340.71,4032.38 4345.92,4032.38 ccw(c4345.92,4037.28) 4350.81,4037.28 cw(c4355.71,4037.28) 4355.71,4042.17 4508.59,4042.17 4556.34,3994.42 4608.66,3994.42 4628.39,4014.16 4628.39,4945.78 v1(4609.34,4964.84)
K_PULL4: CN5.5 U2.16 | length 719.3
  Top Layer w6: v1(4110,4100) 4120.24,4089.76 U2.16 ; CN5.5 4560,3992.4 v1(4595,4027.4)
  Bottom Layer w6: v1(4110,4100) 4522.4,4100 v1(4595,4027.4)
MCU_RTS: U2.33 U7.2 U7.3 | length 1058.8
  Top Layer w6: U7.2 3728.8,4969 ; U7.3 3778.8,4971.2 3775,4975 3734.8,4975 3728.8,4969 ; U2.33 3994.97,4308.07 3994.97,4375.03 3977.02,4392.98 3977.02,4492.98 3905.03,4564.97 3840.03,4564.97 3744.97,4660.03 3744.97,4802.44 3657.41,4889.99 3657.41,4957.41 3675,4975 3722.8,4975 3728.8,4969
MCU_RX: H2.4 RN3.3 U2.31 U7.1 | length 2140.1
  Top Layer w6: U7.1 3678.8,4896.2 3754.98,4820.02 3754.98,4664.18 3844.18,4574.99 3909.18,4574.99 4009.65,4474.51 v1@4009.65,4458.46 ; v1(3998.01,4458.46) v1@4009.65,4458.46 ; v1(4164.59,4169.8) 4158.59,4175.8 4079.2,4175.8 4036.12,4218.88 U2.31 4037.42,4307.59 4037.42,4378.41 4009.65,4406.18 v1@4009.65,4458.46 ; v1(4273.92,4155.73) 4279.92,4161.73 4279.92,4218.92 4288.11,4227.11 RN3.3
  Bottom Layer w6: H2.4 3901.82,3870.44 3809.49,3962.77 3809.49,4119.87 3879.12,4189.49 3879.12,4265.98 3955.38,4342.24 3955.38,4406.21 3998.01,4448.84 v1(3998.01,4458.46) ; v1(4164.59,4169.8) 4178.67,4155.73 v1(4273.92,4155.73)
MCU_SCL1: CN2.1 RN2.1 U2.25 | length 5040.6
  Top Layer w6: v1(4150,4375) 4154.23,4370.77 U2.25 ; v3(4198.87,3797.71) 4194.89,3801.69 4194.89,3826.89 4214.95,3846.95 4214.95,3977.45 4251.79,4014.29 4251.79,4096.79 4286.54,4131.54 RN2.1 ; CN2.1 4514.08,6596.05 v1(4701.43,6596.05)
  Bottom Layer w6: v1(4150,4375) 4150,4383.49 4118.01,4415.47 4072.93,4415.47 4039.2,4381.74 4039.2,4206.38 3909.65,4076.83 3909.65,4004.25 4096.01,3817.89 4178.69,3817.89 v3(4198.87,3797.71) 4207.68,3788.9 4543.61,3788.9 4584.37,3748.14 4646.99,3748.14 4732.49,3833.64 4732.49,4615.08 4754.44,4637.04 4754.44,4739.75 4712.46,4781.73 4712.46,5596.67 4734.41,5618.63 4734.41,5718.73 4692.42,5760.71 4692.42,6368.89 4722.47,6398.94 4722.47,6575.01 v1(4701.43,6596.05)
MCU_SCL2: CN3.1 RN2.2 U2.26 | length 3901.3
  Top Layer w6: v1(4119.04,4384.75) 4119.04,4376.27 4134.54,4360.77 U2.26 ; v3(4213.72,3819.09) 4224.97,3830.34 4224.97,3973.3 4261.81,4010.14 4261.81,4076.81 4285.05,4100.05 RN2.2 ; CN3.1 4708.42,5622.32 v1(4713.42,5627.32)
  Bottom Layer w6: v1(4119.04,4384.75) 4098.34,4405.46 4077.08,4405.46 4049.22,4377.59 4049.22,4202.23 3919.67,4072.68 3919.67,4008.4 4100.16,3827.91 4204.91,3827.91 v3(4213.72,3819.09) 4233.9,3798.91 4547.76,3798.91 4588.51,3758.16 4642.84,3758.16 4722.47,3837.79 4722.47,4619.23 4744.42,4641.19 4744.42,4735.6 4702.44,4777.58 4702.44,5616.34 v1(4713.42,5627.32)
MCU_SCL3: CN4.1 RN2.3 U2.27 | length 2770.3
  Top Layer w6: v1(4085.78,4384.46) 4114.86,4355.38 U2.27 ; v3(4241.72,3817.72) 4234.98,3824.45 4234.98,3969.15 4271.82,4005.99 4271.82,4056.82 4283.55,4068.55 RN2.3 ; CN4.1 v1(4723.43,4649.88)
  Bottom Layer w6: v1(4085.78,4384.46) 4076.77,4375.46 4076.53,4375.46 4064.23,4363.16 4064.23,4362.92 4059.23,4357.92 4059.23,4198.08 3929.68,4068.53 3929.68,4012.55 4104.31,3837.92 4221.52,3837.92 v3(4241.72,3817.72) 4250.51,3808.93 4551.91,3808.93 4592.66,3768.17 4638.7,3768.17 4712.46,3841.93 4712.46,4638.9 v1(4723.43,4649.88)
MCU_SCL4: CN5.1 RN2.4 U2.28 | length 1672.6
  Top Layer w6: v1(4085.23,4354.46) 4095.17,4344.52 U2.28 ; v3(4256.55,3839.13) 4245.23,3850.45 4245.23,3965.23 4281.84,4001.84 4281.84,4031.84 4287.06,4037.06 RN2.4 ; CN5.1 4562.44,3677.44 4630,3745 v1(4630,3789.17)
  Bottom Layer w6: v1(4085.23,4354.46) 4085.23,4209.91 3939.7,4064.39 3939.7,4016.7 4108.46,3847.94 4247.74,3847.94 v3(4256.55,3839.13) 4276.73,3818.95 4556.05,3818.95 4585.83,3789.17 v1(4630,3789.17)
MCU_SDA1: CN2.2 RN1.4 U2.2 | length 4674.7
  Top Layer w6: U2.2 3957.38,4027.07 v1(3960.69,4030.38) ; v3(4312.22,3840.53) 4312.22,3872.35 RN1.4 ; CN2.2 4517.8,6678.5 4587.65,6678.5 cw(c4587.65,6671) 4595.15,6671 4595.15,6633.81 ccw(c4602.65,6633.81) 4610.15,6633.81 4610.15,6723.2 cw(c4617.65,6723.2) 4625.15,6723.2 4625.15,6633.81 ccw(c4632.65,6633.81) 4640.15,6633.81 4640.15,6723.2 cw(c4647.65,6723.2) 4655.15,6723.2 4655.15,6686 ccw(c4662.65,6686) 4662.65,6678.5 v1(4693.39,6678.5)
  Bottom Layer w6: v1(3960.69,4030.38) 3960.69,4009.87 4112.61,3857.95 4264.35,3857.95 4281.77,3840.53 v3(4312.22,3840.53) 4587.64,3840.53 4618.01,3810.16 4651.99,3810.16 4702.44,3860.61 4702.44,4693.82 4724.39,4715.78 4724.39,4741.47 4692.42,4773.43 4692.42,5660.83 4714.38,5682.78 4714.38,5720.62 4680.44,5754.56 4680.44,6391.36 cw(c4687.94,6391.36) 4687.94,6398.86 4702.34,6398.86 ccw(c4702.34,6406.36) 4702.34,6413.86 4687.94,6413.86 cw(c4687.94,6421.36) 4687.94,6428.86 4702.34,6428.86 ccw(c4702.34,6436.36) 4702.34,6443.86 4687.94,6443.86 cw(c4687.94,6451.36) 4687.94,6458.86 4702.34,6458.86 ccw(c4702.34,6466.36) 4702.34,6473.86 4687.94,6473.86 cw(c4687.94,6481.36) 4687.94,6488.86 4702.34,6488.86 ccw(c4702.34,6496.36) 4702.34,6503.86 4687.94,6503.86 cw(c4687.94,6511.36) 4687.94,6518.86 4702.34,6518.86 ccw(c4702.34,6526.36) 4702.34,6533.86 4687.94,6533.86 cw(c4687.94,6541.36) 4687.94,6548.86 4702.34,6548.86 ccw(c4702.34,6556.36) 4702.34,6563.86 4687.94,6563.86 cw(c4687.94,6571.36) 4680.44,6571.36 4680.44,6665.56 v1(4693.39,6678.5)
MCU_SDA2: CN3.2 RN1.3 U2.3 | length 3626.5
  Top Layer w6: U2.3 3977.06,4017.06 v1(3993.02,4033.02) ; v3(4274.17,3874.68) 4282.88,3883.39 4282.88,3902.88 4287.11,3907.11 RN1.3 ; CN3.2 4522.38,5691.48 4587.16,5691.48 ccw(c4587.16,5698.98) 4594.66,5698.98 4594.66,5750.4 cw(c4602.16,5750.4) 4609.66,5750.4 4609.66,5641.81 ccw(c4617.16,5641.81) 4624.66,5641.81 4624.66,5750.4 cw(c4632.16,5750.4) 4639.66,5750.4 4639.66,5641.81 ccw(c4647.16,5641.81) 4654.66,5641.81 4654.66,5750.4 cw(c4662.16,5750.4) 4669.66,5750.4 4669.66,5698.98 ccw(c4677.16,5698.98) 4677.16,5691.48 v1(4693.38,5691.48)
  Bottom Layer w6: v1(3993.02,4033.02) 3993.02,3991.71 4110.04,3874.68 v3(4274.17,3874.68) 4521.24,3874.68 cw(c4521.24,3867.18) 4528.74,3867.18 4528.74,3858.04 ccw(c4536.24,3858.04) 4543.74,3858.04 4543.74,3867.18 cw(c4551.24,3867.18) 4551.24,3874.68 4567.64,3874.68 4622.16,3820.17 4647.84,3820.17 4692.42,3864.75 4692.42,4697.97 4714.38,4719.93 4714.38,4737.32 4682.41,4769.29 4682.41,5680.5 v1(4693.38,5691.48)
MCU_SDA3: CN4.2 RN1.2 U2.4 | length 2539.9
  Top Layer w6: U2.4 3996.75,4006.75 4019.01,4029.01 v1(4019.01,4049.45) ; v3(4264.05,3900.35) 4264.05,3901.24 4282.88,3920.07 4282.88,3932.88 4288.61,3938.61 RN1.2 ; CN4.2 4587.77,4728.62 ccw(c4587.77,4736.12) 4595.27,4736.12 4595.27,4777.15 cw(c4602.77,4777.15) 4610.27,4777.15 4610.27,4680.09 ccw(c4617.77,4680.09) 4625.27,4680.09 4625.27,4777.15 cw(c4632.77,4777.15) 4640.27,4777.15 4640.27,4680.09 ccw(c4647.77,4680.09) 4655.27,4680.09 4655.27,4777.15 cw(c4662.77,4777.15) 4670.27,4777.15 4670.27,4736.12 ccw(c4677.77,4736.12) 4677.77,4728.62 v1(4693.39,4728.62)
  Bottom Layer w6: v1(4019.01,4049.45) 4019.01,3979.88 4098.54,3900.35 v3(4264.05,3900.35) 4556.14,3900.35 4626.3,3830.19 4643.7,3830.19 4682.41,3868.9 4682.41,4717.64 v1(4693.39,4728.62)
MCU_SDA4: CN5.2 RN1.1 U2.5 | length 1505.5
  Top Layer w6: U2.5 4016.43,4011.43 4049.01,4044.01 v1(4049.01,4061.88) ; v3(4264.05,3927.86) 4264.05,3949.05 4279.1,3964.1 4309.5,3964.1 RN1.1 ; CN5.2 4561.18,3756.18 4635,3830 v1(4635,3851.18)
  Bottom Layer w6: v1(4049.01,4061.88) 4049.01,3964.05 4100.04,3913.02 4208.02,3913.02 4222.86,3927.86 v3(4264.05,3927.86) 4337.14,3927.86 4350,3915 4386.63,3915 ccw(c4386.63,3922.5) 4394.13,3922.5 4394.13,3932.91 cw(c4401.63,3932.91) 4409.13,3932.91 4409.13,3922.5 ccw(c4416.63,3922.5) 4424.13,3922.5 4424.13,3932.91 cw(c4431.63,3932.91) 4439.13,3932.91 4439.13,3922.5 ccw(c4446.63,3922.5) 4454.13,3922.5 4454.13,3932.91 cw(c4461.63,3932.91) 4469.13,3932.91 4469.13,3922.5 ccw(c4476.63,3922.5) 4484.13,3922.5 4484.13,3932.91 cw(c4491.63,3932.91) 4499.13,3932.91 4499.13,3922.5 ccw(c4506.63,3922.5) 4514.13,3922.5 4514.13,3932.91 cw(c4521.63,3932.91) 4529.13,3932.91 4529.13,3922.5 ccw(c4536.63,3922.5) 4544.13,3922.5 4544.13,3932.91 cw(c4551.63,3932.91) 4559.13,3932.91 4559.13,3922.5 ccw(c4566.63,3922.5) 4566.63,3915 4570,3915 4581.14,3903.86 ccw(c4586.44,3909.17) 4591.74,3903.86 4616.8,3928.92 cw(c4622.1,3923.62) 4627.41,3918.31 4602.35,3893.26 ccw(c4607.65,3887.95) 4612.96,3882.65 4638.01,3907.71 cw(c4643.32,3902.4) 4648.62,3897.1 4623.56,3872.04 ccw(c4628.87,3866.74) 4623.56,3861.44 4633.82,3851.18 v1(4635,3851.18)
MCU_TX: H2.3 U2.30 U7.4 | length 1749
  Top Layer w6: U7.4 3828.8,4893.8 3765,4830 3765,4668.33 3848.33,4585 3913.33,4585 4019.67,4478.66 4019.67,4468.69 ; v1(4038.14,4468.91) 4019.89,4468.91 4019.67,4468.69 ; U2.30 4055.8,4336.56 4049.22,4343.15 4049.22,4380.78 4019.67,4410.33 4019.67,4468.69
  Bottom Layer w6: H2.3 4001.82,3784.61 3819.51,3966.91 3819.51,4115.72 3889.13,4185.34 3889.13,4261.84 3965.39,4338.1 3965.39,4396.16 v1(4038.14,4468.91)
MOTOR1_H: U2.38 U8.3 | length 2659.6
  Top Layer w6: v1(3830,4237.55) 3840,4227.55 U2.38 ; v1(3921.94,6707.74) 3932.74,6707.74 3945.92,6720.92 U8.3
  Bottom Layer w6: v1(3830,4237.55) 3830,4276.24 3945.36,4391.6 3945.36,4562.05 3992.14,4608.83 3992.14,5783.68 3970.02,5805.81 3970.02,6659.67 v1(3921.94,6707.74)
MOTOR1_HOUT: CN2.9 U8.6 | length 779.3
  Top Layer w20: U8.6 4220.92,6720.92 4260,6760 4370,6760 4390,6780 4390,7196.04 4418.64,7224.68 CN2.9
MOTOR1_L: U2.39 U8.2 | length 2788
  Top Layer w6: v1(3807.56,4217.56) 3817.25,4207.87 U2.39 ; v1(3900.12,6740) 3900.12,6765 3906.04,6770.92 U8.2
  Bottom Layer w6: v1(3807.56,4217.56) 3807.56,4267.97 3935.34,4395.75 3935.34,4566.19 3982.13,4612.98 3982.13,5779.53 3960,5801.66 3960,6640 3900.12,6699.88 v1(3900.12,6740)
MOTOR1_LOUT: CN2.10 U8.8 | length 690.8
  Top Layer w20: U8.8 4210.92,6820.92 4245,6855 4295,6855 4365.98,6925.98 4365.98,7205.98 4463.42,7303.42 CN2.10
MOTOR2_H: U2.40 U9.3 | length 2430.1
  Top Layer w6: v1(3786.35,4196.35) 3794.52,4188.18 U2.40 ; v1(3916.92,6387.8) 3948.66,6387.8 U9.3
  Bottom Layer w6: v1(3786.35,4196.35) 3786.35,4260.92 3925.33,4399.9 3925.33,4570.34 3972.11,4617.12 3972.11,5775.38 3947.97,5799.52 3947.97,6356.76 v1(3916.92,6387.8)
MOTOR2_HOUT: CN3.9 U9.6 | length 476.3
  Top Layer w20: U9.6 4215.92,6395.92 4250,6430 4385,6430 4400,6415 4400,6310 4457.76,6252.24 CN3.9
MOTOR2_L: U2.41 U9.2 | length 2551
  Top Layer w6: v1(3765.14,4175.14) 3771.77,4168.5 U2.41 ; v1(3900.04,6415) 3900.04,6440 3905.96,6445.92 U9.2
  Bottom Layer w6: v1(3765.14,4175.14) 3765.14,4253.87 3915.31,4404.05 3915.31,4574.49 3962.09,4621.27 3962.09,5771.23 3937.96,5795.37 3937.96,6337.08 3895.93,6379.11 3895.93,6410.89 v1(3900.04,6415)
MOTOR2_LOUT: CN3.10 U9.8 | length 488.1
  Top Layer w20: U9.8 4205.92,6495.92 4232.97,6522.97 4382.03,6522.97 4424.02,6480.98 4424.02,6360.98 4454.02,6330.98 CN3.10
MOTOR3_H: U2.42 U10.3 | length 2194.7
  Top Layer w6: v1(3743.92,4153.92) 3749.03,4148.81 U2.42 ; v1(3916.96,6067.8) 3948.7,6067.8 U10.3
  Bottom Layer w6: v1(3743.92,4153.92) 3743.92,4246.82 3905.3,4408.2 3905.3,4578.64 3952.08,4625.42 3952.08,5767.09 3916.96,5802.2 v1(3916.96,6067.8)
MOTOR3_HOUT: CN4.9 U10.6 | length 1060
  Top Layer w20: U10.6 4195.92,6075.92 4221.9,6101.9 4279.24,6101.9 v2(4282.34,6105) ; v2(4405,5480) 4405,5335 4460.2,5279.8 CN4.9
  Bottom Layer w20: v2(4282.34,6105) 4405,5982.34 v2(4405,5480)
MOTOR3_L: U2.43 U10.2 | length 2316.7
  Top Layer w6: v1(3721.36,4133.93) 3726.16,4129.13 U2.43 ; v1(3898.41,6091.67) 3898.41,6118.33 3906,6125.92 U10.2
  Bottom Layer w6: v1(3721.36,4133.93) 3721.36,4238.42 3895.28,4412.35 3895.28,4582.79 3942.06,4629.57 3942.06,5762.94 3895.97,5809.03 3895.97,6089.24 v1(3898.41,6091.67)
MOTOR3_LOUT: CN4.10 U10.8 | length 1054
  Top Layer w20: U10.8 4195.92,6175.92 v2(4230,6210) ; v2(4440,5515) 4440,5385 4466.46,5358.54 CN4.10
  Bottom Layer w20: v2(4230,6210) 4230,6205.4 4429.02,6006.39 4429.02,5525.98 v2(4440,5515)
MOTOR4_H: U2.45 U11.3 | length 1965
  Top Layer w6: v1(3755.99,4088.45) 3877.33,4088.45 U2.45 ; v1(3916.88,5747.8) 3948.62,5747.8 U11.3
  Bottom Layer w6: v1(3755.99,4088.45) 3732.16,4088.45 3700.37,4120.24 3700.37,4231.6 3885.27,4416.5 3885.27,4586.94 3932.05,4633.72 3932.05,5732.64 v1(3916.88,5747.8)
MOTOR4_HOUT: CN5.9 U11.6 | length 1703.9
  Top Layer w20: U11.6 4195.92,5755.92 4225,5785 v2(4270,5785) ; v2(4383.47,4548.47) 4410,4521.94 4410,4360 4462.64,4307.36 CN5.9
  Bottom Layer w20: v2(4270,5785) 4345,5710 4345,5440 4383.47,5401.53 v2(4383.47,4548.47)
MOTOR4_L: U2.46 U11.2 | length 2062.7
  Top Layer w6: v1(3775.52,4065.55) 3874.12,4065.55 U2.46 ; v1(3900,5775) 3900,5800 3905.92,5805.92 U11.2
  Bottom Layer w6: v1(3775.52,4065.55) 3740.89,4065.55 3690.35,4116.09 3690.35,4235.75 3875.25,4420.64 3875.25,4591.09 3922.03,4637.87 3922.03,5712.97 3895.89,5739.11 3895.89,5770.89 v1(3900,5775)
MOTOR4_LOUT: CN5.10 U11.8 | length 1692.2
  Top Layer w20: U11.8 4195.92,5855.92 v2(4225,5885) ; v2(4430,4555) 4445,4540 4445,4415 4473.9,4386.1 CN5.10
  Bottom Layer w20: v2(4225,5885) 4225,5878.06 4369.02,5734.05 4369.02,5455.98 4407.49,5417.51 4407.49,4577.51 v2(4430,4555)
NRST: C6.2 RN3.4 SW1.1 U2.7 | length 933.3
  Top Layer w6: SW1.1 3960,3760 3994.23,3794.23 3994.23,3854.01 C6.2 4020.93,3881.51 4055.8,3916.38 U2.7 4055.8,3996.4 4085,4025.59 v1(4085,4125) ; v1(4315,4165) 4315,4195.13 RN3.4
  Bottom Layer w6: v1(4085,4125) 4105.71,4145.71 4138.42,4145.71 4149.39,4134.74 4284.74,4134.74 v1(4315,4165)
RGB_OUT1: CN2.4 U2.18 | length 4862
  Top Layer w6: v1(3953.45,4198.71) 4002.16,4150 4134.13,4150 4155,4129.13 U2.18 ; CN2.4 v1(4693.39,6830.98)
  Bottom Layer w6: v1(3953.45,4198.71) 3953.45,4177.29 3869.59,4093.43 3869.59,3987.66 4079.42,3777.83 4147.17,3777.83 4176.16,3748.84 4367.81,3748.84 4398.55,3718.09 4659.44,3718.09 4762.53,3821.19 4762.53,4602.64 4784.49,4624.59 4784.49,4878.91 4732.49,4930.91 4732.49,5588.38 4754.44,5610.33 4754.44,5848 4702.44,5900 4702.44,6364.74 4732.49,6394.79 4732.49,6669.09 4693.39,6708.19 v1(4693.39,6830.98)
RGB_OUT2: CN3.4 U2.19 | length 3853.9
  Top Layer w6: v1(3974.45,4220.14) 4034.57,4160.02 4139.15,4160.02 4150.35,4148.81 U2.19 ; CN3.4 v1(4713.42,5858.54)
  Bottom Layer w6: v1(3974.45,4220.14) 3974.45,4184.12 3879.6,4089.28 3879.6,3991.81 4083.57,3787.84 4152.16,3787.84 4181.15,3758.85 4371.95,3758.85 4402.7,3728.11 4655.29,3728.11 4752.52,3825.34 4752.52,4606.79 4774.47,4628.74 4774.47,4874.77 4722.47,4926.77 4722.47,5592.52 4744.42,5614.48 4744.42,5725.81 4702.44,5767.79 4702.44,5847.56 v1(4713.42,5858.54)
RGB_OUT3: CN4.4 U2.29 | length 2983.7
  Top Layer w6: U2.29 4075.49,4331.04 4059.23,4347.29 4059.23,4416.46 v1(4081.77,4438.99) ; CN4.4 v1(4733.45,4886.1)
  Bottom Layer w6: v1(4081.77,4438.99) 4070.74,4438.99 3995.44,4363.7 3995.44,4190.95 3889.62,4085.13 3889.62,3995.96 4087.72,3797.86 4157.14,3797.86 4186.13,3768.87 4376.1,3768.87 4406.84,3738.13 4651.14,3738.13 4742.5,3829.49 4742.5,4610.94 4764.46,4632.89 4764.46,4746.83 4722.47,4788.81 4722.47,4875.12 v1(4733.45,4886.1)
RGB_OUT4: CN5.4 U2.32 | length 1276.4
  Top Layer w6: U2.32 v1(4016.43,4355) ; v1(4408.08,3766.57) 4430,3788.49 4430,3880 4463.66,3913.66 CN5.4
  Bottom Layer w6: v1(4016.43,4355) 4016.43,4197.78 3899.64,4080.98 3899.64,4000.1 4091.87,3807.87 4162.13,3807.87 4191.12,3778.88 4395.77,3778.88 v1(4408.08,3766.57)
RS485_A: R8.1 U7.6 | length 742.7
  Top Layer w6: v1(3780,5055) U7.6@3780,5133.18
  Top Layer w10: R8.1 v1(3760,5675.79) ; U7.6 U7.6@3780,5133.18
  Bottom Layer w10: v1(3760,5675.79) 3750,5665.79 3750,5085 v1(3780,5055)
RS485_B: R7.1 U7.7 | length 742.7
  Top Layer w6: v1(3728.8,5055) U7.7
  Top Layer w10: R7.1 v1(3690,5675.79)
  Bottom Layer w10: v1(3690,5675.79) 3730,5635.79 3730,5056.2 v1(3728.8,5055)
SWCLK: H2.2 U2.37 | length 728.8
  Top Layer w6: U2.37 3927.76,4247.24 v1(3930.16,4244.84)
  Bottom Layer w6: v1(3930.16,4244.84) 3922.45,4237.13 3922.45,4176.16 3914.89,4168.61 3914.89,4167.06 3849.56,4101.72 3849.56,3979.36 4070,3758.92 4070,3738.2 H2.2
SWIO: H2.1 U2.34 | length 828.5
  Top Layer w6: v1(3974.38,4250.14) 3977.06,4252.82 U2.34
  Bottom Layer w6: v1(3974.38,4250.14) 3932.46,4208.22 3932.46,4170.46 3859.57,4097.58 3859.57,3983.51 4075.27,3767.81 4140.39,3767.81 H2.1
SYS_RGB: LED1.4 U2.6 | length 4580.7
  Top Layer w6: LED1.4 3769.03,7340.97 3805,7305 3805,7120 3785,7100 3670,7100 3645,7075 3645,6770.53 3680.53,6735 3843.32,6735 v1(3877.01,6701.31) ; v1(3855.03,4271.58) 3860.78,4265.84 3939.16,4265.84 3953.39,4251.61 3953.39,4228.33 3932.46,4207.4 3932.46,4182.54 3975.02,4139.98 4035.02,4139.98 4070,4105 4070,4040 4036.12,4006.12 U2.6
  Bottom Layer w6: v1(3855.03,4271.58) 3855.03,4179.56 3799.48,4124.01 3799.48,4059.48 3784.56,4044.56 3747.72,4044.56 3680.34,4111.94 3680.34,4239.89 3865.23,4424.79 3865.23,4595.23 3912.02,4642.02 3912.02,5708.82 3877.42,5743.42 3877.42,6700.91 v1(3877.01,6701.31)
pads on no net: CN2.11 CN2.12 CN3.11 CN3.12 CN4.11 CN4.12 CN5.11 CN5.12 LED1.2 TP1.1 TP2.1 TP3.1 U1.5

## Polygon pours and split planes (outlines as drawn)
GND on Top Layer (solid, remove dead copper, pour order 0): 3000,8180 5600,8180 5600,3000 3000,3000
GND on Bottom Layer (solid, remove dead copper, pour order 2): 3275,7730 5500,7730 5500,3120 3275,3120

## Keep-outs
Top Layer:
  region: 3881.73,5382.5 4388.16,5382.5 4388.16,4671.72 3881.73,4671.72
  region: 3854.39,6670 3967.89,6670 3967.89,5705.92 3854.39,5705.92
  region: 4283.57,4319.25 4414.83,4319.25 4414.83,3837.92 4285,3837.92 4285,3840 4283.57,3840
Board Outline Layer:
  region: 4033.36,4581.56 3853.69,4581.56 3853.69,4309.44 3796.18,4309.44 3796.18,3774.19 4286.08,3774.19 4286.08,4312.21 4205.79,4312.21 4205.79,4409.13
  lines w10: 3600,3569.37 ccw(c3639.37,3569.37) 3639.37,3530 4790.63,3530 ccw(c4790.63,3569.37) 4830,3569.37 4830,7410.63 ccw(c4790.63,7410.63) 4790.63,7450 3639.37,7450 ccw(c3639.37,7410.63) 3600,7410.63 3600,3569.37

## Other copper
Top Layer:
  drawing of 484 lines, arcs and shapes, not listed
Bottom Layer:
  drawing of 144 lines, arcs and shapes, not listed

## Silkscreen, mask and mechanical layers (free items; w line width, h text height)
Top Silkscreen Layer:
  circle w10: c3820.31,4824.97 r39.69
  region: 3922.74,7400 3965,7400 3965,7344.46
  region: 3620,6535 3780,6375 3780,6075 3620,5915
  lines w10: 3800,3757.02 3915.32,3757.02 3915.32,3860 3800,3860 3800,3757.02 ; 3880.01,4672.73 4391.82,4672.73 4391.82,5381.39 3880.01,5381.39 3880.01,4672.73
  text "4" at 4475,7380 h80 r270
  text "3" at 4475,6407.56 h80 r270
  text "2" at 4475,5435.12 h80 r270
  text "+" at 3777.95,4755.77 h140
  text "1" at 4475,4462.68 h80 r270
  text "B" at 3615,3885 h80
  text "R T /  - +" at 3810,3755 h50
  text "R" at 3615,3625 h80
Bottom Silkscreen Layer:
  region: 4050.91,3903.28 4063.89,3903.28 4063.89,3763.2 4050.91,3763.2
  region: 3620,6535 3780,6375 3780,6075 3620,5915
  lines w10: 3827.04,3758.99 4277.47,3758.99 4277.47,3905.1 3827.04,3905.1 3827.04,3758.99 ; 3827.04,3758.99 4275.14,3758.99 4275.14,3556.94 3827.04,3556.94 3827.04,3758.99 ; 4060,6880 4320,6880 4320,7150 4060,7150 4060,6880
  text "GND 24V /   B   A" at 4057.34,6881.46 h70 r180
  text "Tx Rx /  V+ GND" at 4042.07,3762.61 h70
  text "IO CLK /  ETxERx" at 4272.07,3762.61 h70